# Altium PCB DS627-1.1-A机械能守恒实验器.PcbDoc
Units mm, origin at the board's own origin, x right, y up, seen from the top; angles counter-clockwise.
Board outline 64 x 42 mm, 2 copper layers (Top Layer, Bottom Layer), stack 1.581 mm thick; 33 components, 40 nets, 159 pads, 46 vias.
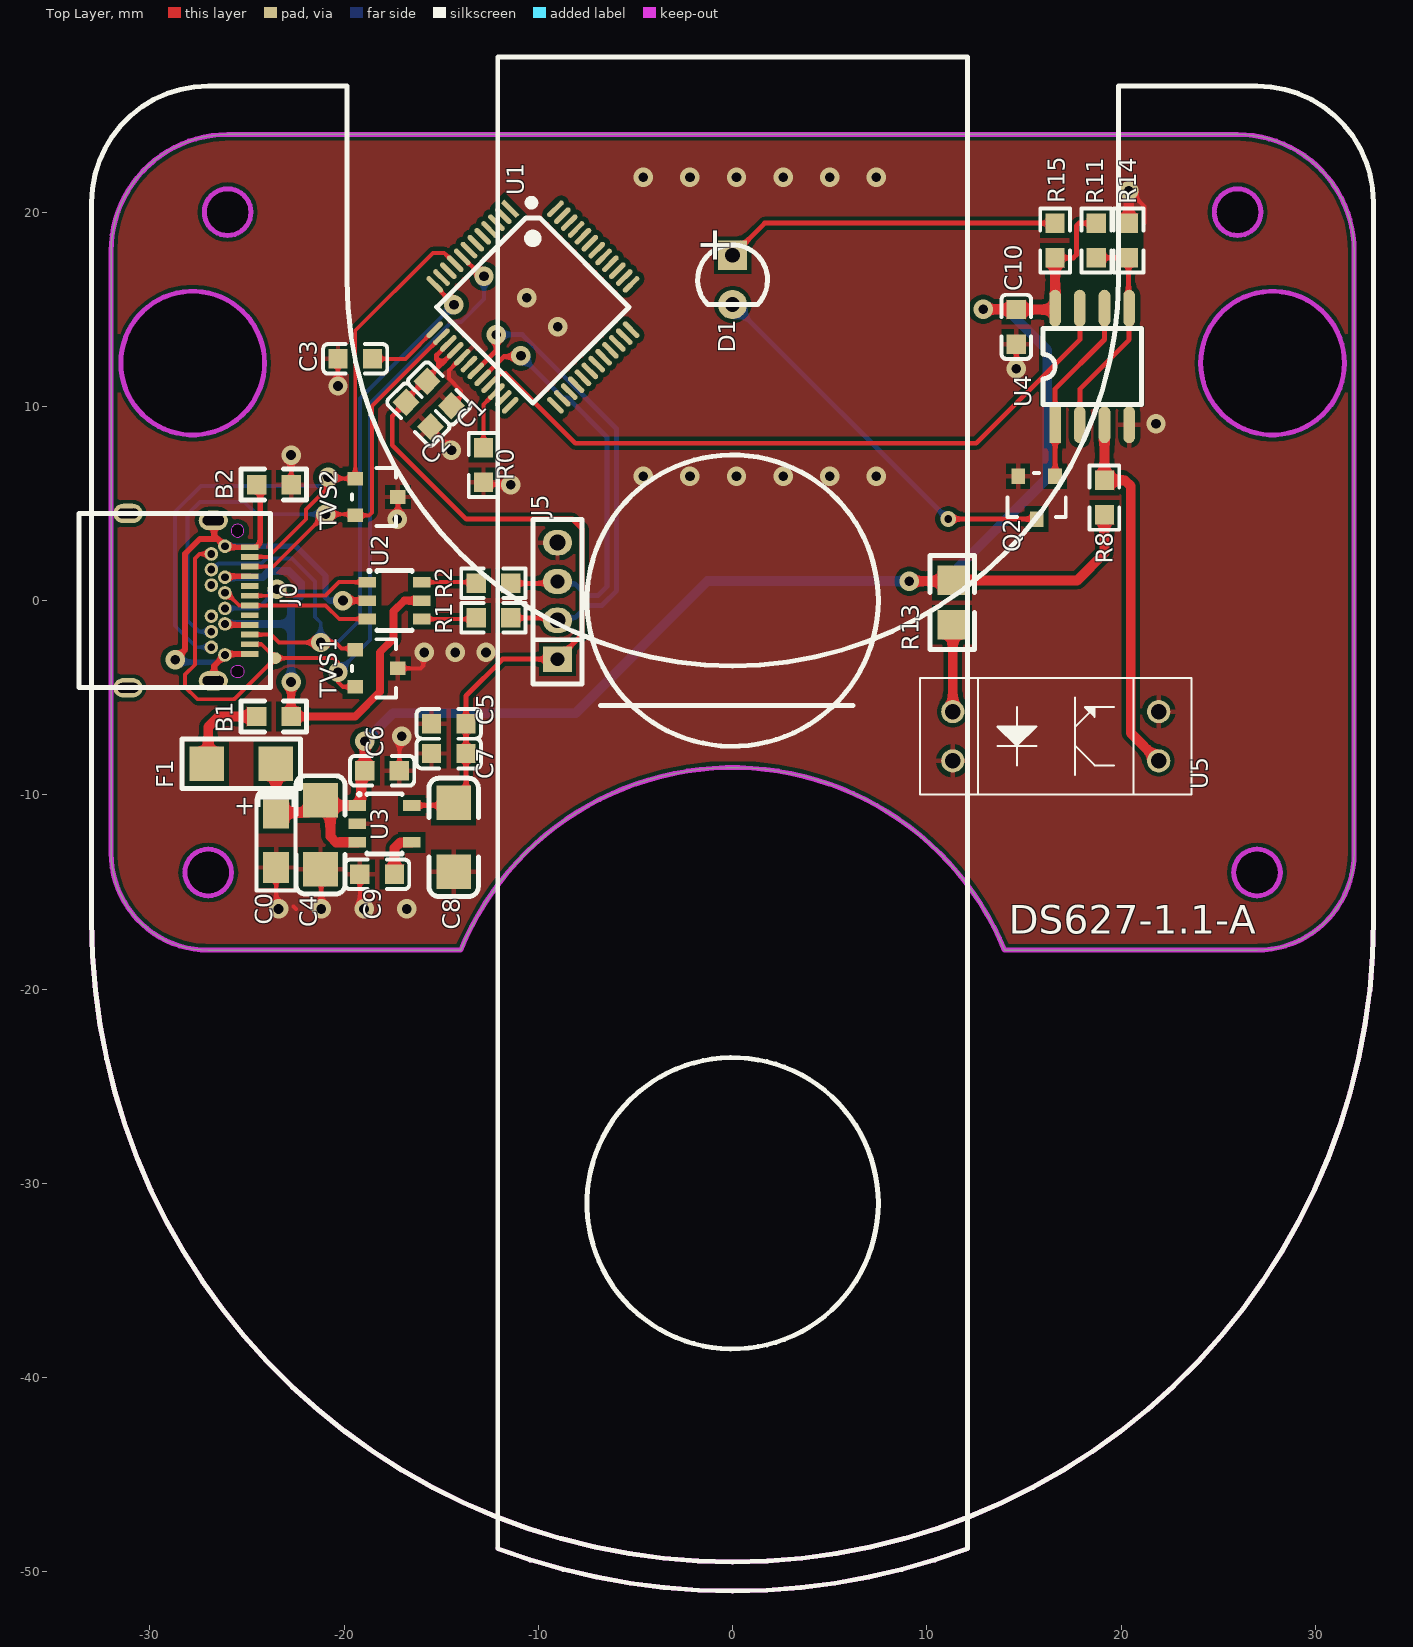
[diagram p0: Top Layer view]
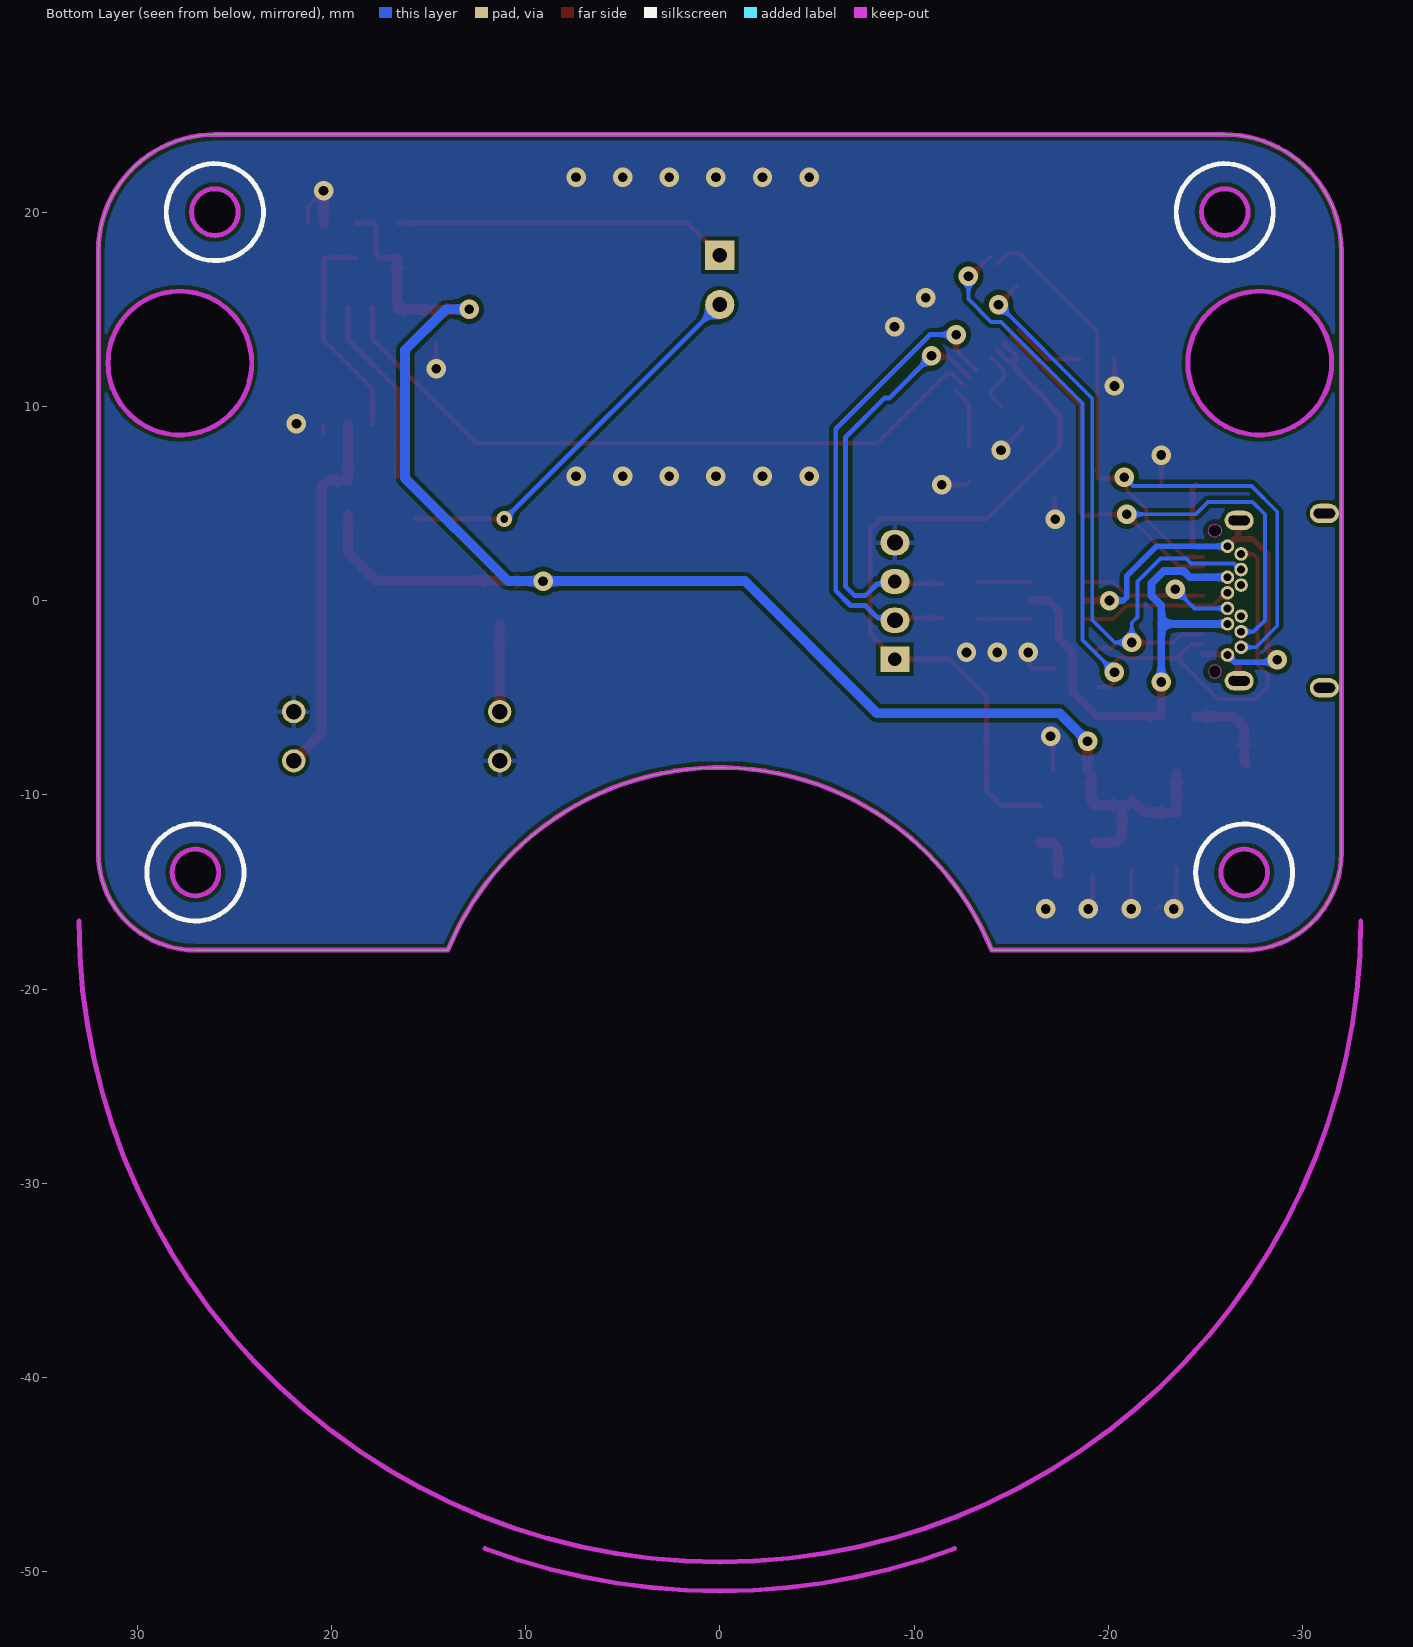
[diagram p1: Bottom Layer view, seen from below]
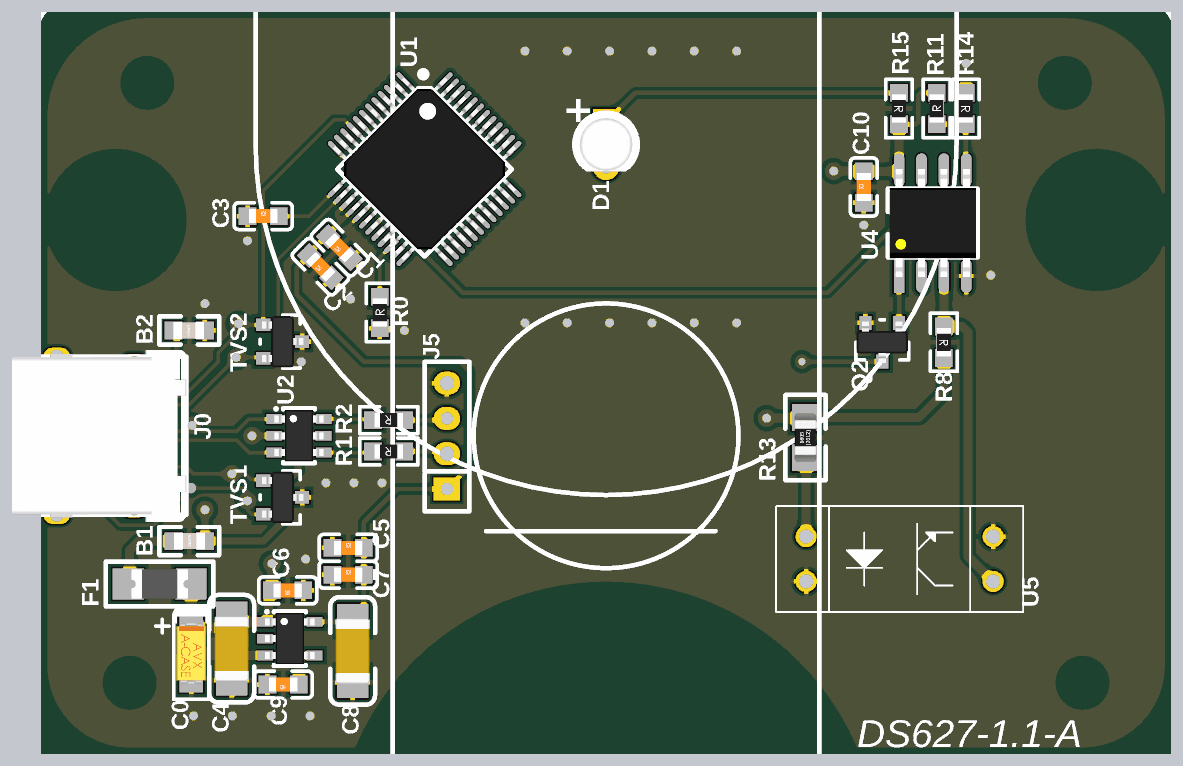
[diagram p2: 3D render of the assembled board from above, using the file's embedded part models]

## Layer stack, top to bottom
Top Solder: solder mask 0.0102, Solder Resist, Dk 3.5
Top Layer: signal copper 0.0356
Dielectric 1: dielectric 1.51, FR-4, Dk 4.8
Bottom Layer: signal copper 0.0356
Bottom Solder: solder mask 0.0102, Solder Resist, Dk 3.5

## Board outline
-27,-18 cw(c-27,-13) -32,-13 -32,18 cw(c-26,18) -26,24 26,24 cw(c26,18) 32,18 32,-13 cw(c27,-13) 27,-18 14,-18 ccw(c0,-23.725) -14,-18
cut-out: 27.8,8.53 cw(c27.8,12.23) 24.1,12.23 cw(c27.8,12.23) 27.8,15.93 cw(c27.8,12.23) 31.5,12.23 cw(c27.8,12.23)
cut-out: -27.8,8.53 cw(c-27.8,12.23) -31.5,12.23 cw(c-27.8,12.23) -27.8,15.93 cw(c-27.8,12.23) -24.1,12.23 cw(c-27.8,12.23)
cut-out: 26,18.8 cw(c26,20) 24.8,20 cw(c26,20) 26,21.2 cw(c26,20) 27.2,20 cw(c26,20)
cut-out: -26,18.8 cw(c-26,20) -27.2,20 cw(c-26,20) -26,21.2 cw(c-26,20) -24.8,20 cw(c-26,20)
cut-out: -27,-15.2 cw(c-27,-14) -28.2,-14 cw(c-27,-14) -27,-12.8 cw(c-27,-14) -25.8,-14 cw(c-27,-14)
cut-out: 27,-15.2 cw(c27,-14) 25.8,-14 cw(c27,-14) 27,-12.8 cw(c27,-14) 28.2,-14 cw(c27,-14)

## Design rules (kind name [scope] priority, off if disabled: settings)
Clearance [All] p1: gap=0.254 ignorepadtopadclearanceinfootprint=TRUE except(0: Arc-Hole Track-Hole SMDPad-Hole THPad-Hole Via-Hole Fill-Hole Poly-Hole Region-Hole Text-Hole; 0.12: THPad-THPad; 0.15: Arc-SMDPad Arc-THPad Track-SMDPad Track-THPad SMDPad-SMDPad; 0.2: Arc-Arc Arc-Track Arc-Via Arc-Fill Arc-Poly Arc-Region Arc-Text Track-Track Track-Via Track-Fill Track-Poly Track-Region Track-Text SMDPad-THPad SMDPad-Text THPad-Fill THPad-Poly THPad-Region)
MinimumSolderMaskSliver [All] p1: minsoldermaskwidth=0.2
PolygonConnect GND [All] p1: thpad.connectstyle=Relief thpad.reliefconductorwidth=0.254 thpad.reliefentries=4 thpad.polygonreliefangle="90 Angle" thpad.airgapwidth=0.254 smdpad.connectstyle=Relief smdpad.reliefconductorwidth=0.254 smdpad.reliefentries=4 smdpad.polygonreliefangle="90 Angle" smdpad.airgapwidth=0.254 via.connectstyle=Direct via.reliefconductorwidth=0.254 via.reliefentries=4 via.polygonreliefangle="90 Angle" via.airgapwidth=0.254
PolygonConnect VSS [InNet('VSS') vs InNet('VSS')] p2: thpad.connectstyle=Relief thpad.reliefconductorwidth=0.508 thpad.reliefentries=4 thpad.polygonreliefangle="90 Angle" thpad.airgapwidth=0.254 smdpad.connectstyle=Relief smdpad.reliefconductorwidth=0.508 smdpad.reliefentries=4 smdpad.polygonreliefangle="90 Angle" smdpad.airgapwidth=0.254 via.connectstyle=Direct via.reliefconductorwidth=0.508 via.reliefentries=4 via.polygonreliefangle="90 Angle" via.airgapwidth=0.254
RoomDefinition DS627-1.1-A机械能守恒实验器 [InComponentClass('DS627-1.1-A机械能守恒实验器')] p1: confinementstyle=ConfineIn formatcopy=TRUE lockcomponents=FALSE outline -206.3,-522.5 -155.5,-522.5 -155.5,-497.1 -206.3,-497.1
RoutingVias [All] p1: holewidth=0.6 width=1 viastyle="Through Hole" minholewidth=0.4 minwidth=0.8 maxholewidth=1 maxwidth=2
SilkToSilkClearance [All] p1: silktosilkclearance=0.1
SilkToSolderMaskClearance [IsPad] p1: minsilkscreentomaskgap=0.05 clearancetoexposedcopper=TRUE
SolderMaskExpansion [All] p1: expansion=0.102 istentingtop=FALSE
Width [All] p1: maxlimit=1 minlimit=0.2 preferedwidth=0.2
27 further rules are at their usual default settings.

## Components (designator, comment, footprint, x,y, rotation, side; value= is the part's Value field where it differs from the comment)
B1 "CBM160808U102" 0603Bead -23.622,-5.969 r180 top
B2 "CBM160808U102" 0603Bead -23.622,5.969 r0 top
C0 "AVX_10uF/16V ±10％(C106)" AVX_3216-18(1206)_SMD -23.506,-12.332 r270 top value=10uF
C1 "SMDCAP00013" 0603CAP -15.107,10.662 r135 top value=100nF
C2 "SMDCAP00012" 0603CAP -16.184,9.584 r135 top value=4.7uF
C3 "SMDCAP00015" 0603CAP -19.431,12.446 r0 top value=1uF
C4 "MLCC 10uF 50V ±20％ 1206" 1206CAP -21.22,-12.065 r90 top value=10uF
C5 "SMDCAP00013" 0603CAP -14.616,-6.35 r0 top value=100nF
C6 "SMDCAP00015" 0603CAP -18.045,-8.763 r180 top value=1uF
C7 "SMDCAP00015" 0603CAP -14.616,-7.874 r0 top value=1uF
C8 "MLCC 10uF 50V ±20％ 1206" 1206CAP -14.362,-12.192 r90 top value=10uF
C9 "SMDCAP00010" 0603CAP -18.298,-14.097 r180 top value=10nF
C10 "SMDCAP00013" 0603CAP 14.605,14.097 r90 top value=100nF
D1 "Φ3 透明发红 DIP2" LED_3mm_red 0,16.51 r270 top locked value=red
F1 "SMD1206-050C-16V" 1206FUSE -25.3,-8.4 r0 top value="16V /0.5A"
J0 "USB_Type_C_24P" USB_TYPE_C_24P_Receptacle -28,0 r270 top locked
J5 "DIP4单排直针  间距2mm 针长11mm 铜" H4 -9.017,-3.016 r90 top value=4P
Q2 "SMDIC000037" SOT23 15.65,5.3 r180 top value=DTC114ECA
R0 "Chip 0R 1/16W ±1％ 0603" 0603RES -12.827,6.985 r90 top value=0R
R1 "Chip 22R 1/16W ±1％ 0603" 0603RES -12.319,-0.889 r180 top value=22R
R2 "Chip 22R 1/16W ±1％ 0603" 0603RES -12.319,0.889 r180 top value=22R
R8 "Chip 1K 1/16W ±1％ 0603" 0603RES 19.146,5.3 r270 top value=1K
R11 "SMDRES00090" 0603RES 18.732,18.542 r90 top value="20K ±0.1%"
R13 "SMDRES00016" 0805RES 11.3,-0.1 r90 top value=100R
R14 "SMDRES00034" 0603RES 20.383,18.542 r270 top value="5K ±0.1%"
R15 "SMDRES00034" 0603RES 16.6,18.542 r270 top value=1K
TVS1 "MMBZ9V1A" SOT23 -18.331,-3.49 r270 top
TVS2 "MMBZ9V1A" SOT23 -18.331,5.334 r270 top
U1 "STC32G12K128_35I LQFP48" LQFP-48 -10.287,15.113 r315 top value=STC32G12K128
U2 "82400102" SOT23-6 -17.402,0 r270 top
U3 "ME6211C33M5G-N" SOT23-5 -17.921,-11.496 r270 top
U4 "LMV358IDGKR  VSSOP-8" SO-8 16.606,9.055 r90 top value=LMV358
U5 "XL-ITR8402" XL-ITR8402_L14.0-W6.0 16.637,-6.984 r180 top

## Footprints (in the part's own frame and the unit in brackets; to place one, negate y for a bottom-side part, rotate by r counter-clockwise, add the part's x,y. Pads: shape width x height; smd on the part's side, far side on the other; paste and mask are expansions set on the pad)
0603Bead [mm]
  rect 1x1 smd: 1(-0.889,0) 2(0.889,0)
  silkscreen extent -1.69,-0.8 1.69,0.8, body extent -0.9,-0.48 0.85,0.48, height 0.95
0603CAP [mm]
  rect 1x1 smd: 1(-0.889,0) 2(0.89,0)
  silkscreen extent -1.65,-0.76 1.65,0.76, body extent -0.8,-0.4 0.8,0.4, height 0.3
0603RES [mm]
  rect 1x1 smd: 1(-0.889,0) 2(0.889,0)
  silkscreen extent -1.65,-0.76 1.65,0.76, body extent -0.8,-0.41 0.8,0.41, height 0.51
0805RES [mil]
  rect 60x60 smd: 1(-45,0) 2(45,0)
  silkscreen extent -95,-45 95,45, body extent -55,-25 55,25, height 32
1206CAP [mil]
  rect 70x70 smd: 1(-70,0) 2(70,0)
  silkscreen extent -120,-50 120,50, body extent -73,-38 73,38, height 47
1206FUSE [mil]
  rect 70x70 smd: 1(-70,0) 2(70,0)
  silkscreen extent -120,-50 120,50, body extent -63,-33 63,33, height 57
AVX_3216-18(1206)_SMD [mm]
  rect 1.6x1.35 smd: 1(-1.41,0) 2(1.41,0)
  silkscreen extent -2.6,-1 2.6,1, body extent -1.7,-0.84 1.7,0.84, height 1.71
H4 [mm]
  rect 1.3x1.5 hole 0.7: 1(0,0)
  oval 1.3x1.5 hole 0.813: 2(2,0) 4(6,0)
  oval 1.3x1.5 hole 0.7: 3(4,0)
  silkscreen extent -1.27,-1.27 7.2,1.27
LED_3mm_red [mm]
  rect 1.5x1.5 hole 0.76: 1(-1.27,0)
  round 1.5 hole 0.76: 2(1.27,0)
  silkscreen extent -1.8,-1.8 1.27,1.8, body extent -1.9,-1.9 1.53,1.9, height 7.64
LQFP-48 [mm]
  rect 1.1x0.27 smd mask+0.08: 1(-4.4,2.75)
  oval 1.1x0.27 smd mask+0.08: 2(-4.4,2.25) 3(-4.4,1.75) 4(-4.4,1.25) 5(-4.4,0.75) 6(-4.4,0.25) 7(-4.4,-0.25) 8(-4.4,-0.75) 9(-4.4,-1.25) 10(-4.4,-1.75) 11(-4.4,-2.25) 12(-4.4,-2.75) 25(4.4,-2.75) 26(4.4,-2.25) 27(4.4,-1.75) 28(4.4,-1.25) 29(4.4,-0.75) 30(4.4,-0.25) 31(4.4,0.25) 32(4.4,0.75) 33(4.4,1.25) 34(4.4,1.75) 35(4.4,2.25) 36(4.4,2.75)
  oval 0.27x1.1 smd mask+0.08: 13(-2.75,-4.4) 14(-2.25,-4.4) 15(-1.75,-4.4) 16(-1.25,-4.4) 17(-0.75,-4.4) 18(-0.25,-4.4) 19(0.25,-4.4) 20(0.75,-4.4) 21(1.25,-4.4) 22(1.75,-4.4) 23(2.25,-4.4) 24(2.75,-4.4) 37(2.75,4.4) 38(2.25,4.4) 39(1.75,4.4) 40(1.25,4.4) 41(0.75,4.4) 42(0.25,4.4) 43(-0.25,4.4) 44(-0.75,4.4) 45(-1.25,4.4) 46(-1.75,4.4) 47(-2.25,4.4) 48(-2.75,4.4)
  silkscreen extent -3.95,-3.5 3.5,3.85, body extent -4.51,-4.5 4.5,4.5, height 1.54
SO-8 [mm]
  rect 1.9x0.6 smd: 1(0,0)
  oval 1.9x0.6 smd: 2(0,-1.27) 3(0,-2.54) 4(0,-3.81) 5(6,-3.81) 6(6,-2.54) 7(6,-1.27) 8(6,0)
  silkscreen extent 1.05,-4.44 4.95,0.64, body extent -0.07,-4.35 6.07,0.54, height 1.77
SOT23 [mm]
  rect 0.7x0.8 smd: 1(-0.95,-1.1) 2(0.95,-1.1) 3(0,1.1)
  silkscreen extent -1.5,-1.27 1.5,1, body extent -1.46,-1.17 1.46,1.17, height 1
SOT23-5 [mm] "SOT-23/SC-74A; 5 Leads; Body 3.1 x 3 mm, inc. leads (LxW max)"
  rect 0.55x0.9 smd: 1(-0.95,-1.4) 2(0,-1.4) 3(0.95,-1.4) 4(0.95,1.4) 5(-0.95,1.4)
  silkscreen extent -1.58,-1.36 1.55,0.9, body extent -1.45,-1.4 1.45,1.4, height 1.45
SOT23-6 [mm] "SOT-23/SC-74A; 5 Leads; Body 3.1 x 3 mm, inc. leads (LxW max)"
  rect 0.55x0.9 smd: 1(-0.95,-1.4) 2(0,-1.4) 3(0.95,-1.4) 4(0.95,1.4) 5(0,1.4) 6(-0.95,1.4)
  silkscreen extent -1.58,-1.36 1.55,0.9, body extent -1.45,-1.4 1.45,1.4, height 1.45
USB_TYPE_C_24P_Receptacle [mm]
  oval 1x1.5 hole 0.5 slot 1.1 at 90.5 deg: 0(-4.49,-3.13) 0(-4.13,1.26) 0(4.13,1.26) 0(4.49,-3.13)
  rect 0.3x0.9 smd mask+0.1: A1(-2.75,3.13) A2(-2.25,3.13) A3(-1.75,3.13) A4(-1.25,3.13) A5(-0.75,3.13) A6(-0.25,3.13) A7(0.25,3.13) A8(0.75,3.13) A9(1.25,3.13) A10(1.75,3.13) A11(2.25,3.13) A12(2.75,3.13)
  round 0.7 hole 0.4: B1(2.8,1.86) B2(2.4,1.16) B3(1.6,1.16) B4(1.2,1.86) B5(0.8,1.16) B6(0.4,1.86) B7(-0.4,1.86) B8(-0.8,1.16) B9(-1.2,1.86) B10(-1.6,1.16) B11(-2.4,1.16) B12(-2.8,1.86)
  Keep-Out Layer board cut-out: 3.98,2.51 3.955,2.384 3.883,2.277 3.776,2.205 3.65,2.18 3.65,2.18 3.524,2.205 3.417,2.277 3.345,2.384 3.32,2.51 3.32,2.51 3.345,2.636 3.417,2.743 3.524,2.815 3.65,2.84 3.65,2.84 3.776,2.815 3.883,2.743 3.955,2.636 3.98,2.51
  Keep-Out Layer board cut-out: -3.93,2.51 -3.905,2.384 -3.833,2.277 -3.726,2.205 -3.6,2.18 -3.6,2.18 -3.474,2.205 -3.367,2.277 -3.295,2.384 -3.27,2.51 -3.27,2.51 -3.295,2.636 -3.367,2.743 -3.474,2.815 -3.6,2.84 -3.6,2.84 -3.726,2.815 -3.833,2.743 -3.905,2.636 -3.93,2.51
  silkscreen extent -4.48,-5.66 4.48,4.21, body extent -4.87,-5.66 4.88,4.21, height 3.36
XL-ITR8402_L14.0-W6.0 [mm] "14x6 光电开关"
  round 1.2 hole 0.8: 1(5.3,-1.27) 2(5.3,1.27) 3(-5.3,1.27) 4(-5.3,-1.27)
  silkscreen extent -7,-3 7,3

## Part data
B1 B2: library part "Chip Ferrite Bead 0606", "贴片磁珠"
C0: "钽电容"
C1 C5 C10: library part "MLCC 100nF 50V ±10％ 0603", "贴片电容"
C2: library part "MLCC 4.7uF 50V ±10％ 0603", "贴片电容"
C3 C6 C7: library part "MLCC 1uF 50V ±10％ 0603", "贴片电容"
C4 C8: "贴片电容"
C9: library part "MLCC 10nF 50V ±10％ 0603", "贴片电容"
D1: "插件LED"
F1: "贴片自恢复保险丝 16V /0.5A"
J5: "单排直针"
Q2: library part "DTC114ECA SOT-23 长电", "数字晶体管"
R0 R1 R2 R8: "贴片电阻"
R11: library part "Chip 20K 1/10W ±0.1％ 0603"
R13: library part "Chip 100R 1/10W ±1％ 0805", "贴片电阻"
R14: library part "Chip 5K 1/10W ±0.1％ 0603"
R15: library part "Chip 1K 1/16W ±1％ 0603", "贴片电阻"
TVS1 TVS2: library part TVS, "瞬态抑制二极管"
U1: "单片机芯片"
U2: "瞬态抑制二极管(TVS)"
U3: "稳压芯片"
U4: "双路、5.5V、1MHz、4mV 失调电压、RRO 运算放大器"
U5: "光电开关"

## Free pads (board coordinates)
  round 0.6 smd mask+0.102: 2(-23.536,-2.962)

## Via types
v1: diameter 1, hole 0.5, Top Layer to Bottom Layer, tented both sides, 45 vias
v2: diameter 0.813, hole 0.406, Top Layer to Bottom Layer, tented both sides, 1 vias

## Nets (pads, with @x,y where several pads share a name; then routed paths per layer and width w, separated by ;. In a path a pad name is that pad's centre, name@x,y a point inside that pad or via, vN(x,y) a via of type N, cw(c..) or ccw(c..) an arc to the next point about the centre after c; other vN are vias at no path point)
ADC0: U1.5
ADC1: U1.6
D+_I/O1: J0.A6 J0.B6 U2.1 | length 10.2
  Top Layer w0.2: J0.A6 -23.849,0.25 -23.509,0.59 v1(-23.457,0.59) -23.276,0.59 -22.94,0.254 -20.955,0.254 -20.259,0.95 U2.1
  Bottom Layer w0.2: -25.647,-0.374 -26.114,-0.374 J0.B6 -24.447,-0.4 v1(-23.457,0.59)
D-_I/O2: J0.A7 J0.B7 U2.3 | length 7.9
  Top Layer w0.2: J0.B7 -26.054,0.4 -25.404,-0.25 J0.A7 -20.955,-0.25 -20.255,-0.95 U2.3
DAC_OUT: U1.10
Dis1_red_EN: U1.35
Dis2_green_EN: U1.34
Dis3_blue_EN: U1.36
GND: B2.2 C0.2 C1.1 C2.1 C3.1 C4.1 C5.1 C6.1 C7.1 C8.1 C9.2 C10.1 J5.4 Q2.2 R0.1 R14.1 TVS1.3 TVS2.3 U1.17 U3.2 U4.4 U5.2 U5.4 | length 25.9
  Top Layer w0.2: v1@-23.506,-15.748 C0.2 ; B2.2 v1(-22.733,7.493) ; -22.606,-15.748 -22.479,-15.875 ; C4.1 -21.178,-13.885 v1(-21.178,-15.875) ; v1(-20.32,11.049) C3.1 ; C9.2 -19.188,-15.447 -18.976,-15.659 v1(-18.976,-15.875) ; v1(-17.272,4.191) -17.231,4.232 TVS2.3 ; TVS1.3 -16.063,-3.49 -15.923,-3.35 -15.923,-2.715 v1(-15.875,-2.667) ; C6.1 -17.156,-7.112 v1(-17.029,-6.985) ; C2.1 -15.556,8.825 v1(-14.478,7.747) ; C1.1 -13.97,10.541 -13.97,10.795 -14.605,11.43 -14.605,11.856 U1.17 ; R0.1 -12.7,5.969 v1(-11.43,5.969) ; v1(14.605,11.938) C10.1 ; v1(20.4,21.1) 21.209,20.291 21.209,19.431 ; U4.4@20.416,8.513 U4.4
  Top Layer w0.508: R14.1 20.4,19.447 v1(20.4,21.1)
  other v1: -23.379,-15.875 -16.775,-15.875 -14.287,-2.667 -12.7,-2.667 -4.6,6.4 -2.2,6.4 0.2,6.4 2.6,6.4 5,6.4 7.4,6.4 21.8,9.1 -9,14.1 -10.6,15.6 -4.6,21.8 -2.2,21.8 0.2,21.8 2.6,21.8 5,21.8 7.4,21.8
I2C1_SCL: U1.38
I2C1_SDA: U1.37
IRT_EN: U1.33
KEY_HOME: U1.21 U4.7 | length 36
  Top Layer w0.2: U1.21 -11.948,11.684
  Top Layer w0.254: -11.948,11.684 -11.684,11.684 -8.1,8.1 12.545,8.1 17.876,13.431 U4.7 U4.7@17.907,15.086
NetB1_2: B1.2 F1.1 | length 4.6
  Top Layer w0.508: F1.1 -27,-8.322 -27,-6.5 -26.469,-5.969 B1.2
NetC9_1: C9.1 U3.4 | length 2.4
  Top Layer w0.508: C9.1 -17.409,-12.744 -17.111,-12.446 U3.4
NetD1_1: D1.1 R15.1 | length 17.3
  Top Layer w0.254: D1.1 1.651,19.431 R15.1
NetD1_2: D1.2 Q2.3 | length 20.2
  Top Layer w0.254: v2(11.1,4.2) Q2.3
  Bottom Layer w0.254: D1.2 0.03,15.24 11.07,4.2 v2(11.1,4.2)
NetQ2_1: Q2.1 U4.1 U4.6 | length 9.7
  Top Layer w0.254: Q2.1 16.606,6.406 U4.1 16.606,10.906 19.146,13.446 U4.6
NetR8_1: R8.1 U4.3 U5.3 | length 19.1
  Top Layer w0.508: U4.3 R8.1 20.202,6.189 20.5,5.891 20.5,-6.817 U5.3
NetR11_1: R11.1 R14.2 U4.2 U4.5 | length 11.3
  Top Layer w0.254: U4.2 17.876,10.891 20.416,13.431 U4.5 20.383,15.088 R14.2 R11.1
NetR13_1: R13.1 U5.1 | length 4.5
  Top Layer w0.508: R13.1 11.337,-1.28 U5.1
P3.0/D-/RxD: J5.2 R1.1 U1.19 | length 25
  Top Layer w0.254: U1.19 -12.17,12.876 v1(-12.17,13.694) ; R1.1 J5.2@-9.144,-0.889 ; J5.2 J5.2@-8.873,-0.872
  Bottom Layer w0.254: v1(-12.17,13.694) -10.825,13.694 -5.969,8.839 -5.969,0.508 -6.731,-0.254 -7.493,-0.254 -8.111,-0.872 J5.2@-8.873,-0.872 ; J5.2@-9.144,-0.889 J5.2
P3.1/D+/TxD: J5.3 R2.1 U1.20 | length 21.8
  Top Layer w0.254: U1.20 -11.781,12.558 -10.942,12.558 v1(-10.9,12.6) ; R2.1 -9.112,0.889 J5.3 J5.3@-8.889,0.856
  Bottom Layer w0.254: v1(-10.9,12.6) -8.741,10.441 -8.493,10.441 -6.477,8.426 -6.477,0.718 -6.941,0.254 -7.493,0.254 -8.095,0.856 J5.3@-8.889,0.856
P3.3: R0.2 U1.22 | length 3.2
  Top Layer w0.2: R0.2 -12.827,10.098 U1.22
SPI1/SPI2_CS: J0.A3 J0.B3 TVS2.2 U1.14 | length 32.7
  Top Layer w0.2: J0.A3 -23.65,1.75 v1(-20.955,4.445) -19.492,4.445 TVS2.2 -18.73,4.384 -18.573,4.541 -18.573,10.009 U1.14
  Bottom Layer w0.2: J0.B3@-26.778,-1.6 J0.B3 -27.483,-1.6 -28.067,-1.016 -28.067,4.445 -27.432,5.08 -25.146,5.08 -24.57,4.504 ccw(c-24.428,4.645) -24.428,4.445 v1(-20.955,4.445)
SPI1_MISO: J0.A11 J0.B11 pad.2 TVS1.2 U1.8 | length 46
  Top Layer w0.2: J0.B11 -27.445,2.4 -27.686,2.159 -27.686,-3.302 -28.194,-3.81 -28.194,-4.445 -27.559,-5.08 -25.737,-5.08 ccw(c-25.737,-4.88) -25.596,-5.022 pad.2 ; J0.A11 -24.246,-2.251 pad.2 ; TVS1.2 -19.436,-4.445 -20.068,-4.445 -20.32,-4.193 v1(-20.32,-3.684) -20.32,-3.175 -20.533,-2.962 pad.2 ; U1.8 -13.91,17.694 -12.916,16.7 v1(-12.8,16.7)
  Bottom Layer w0.2: J0.B11@-27.007,2.316 ccw(c-27.007,2.516) -26.866,2.374 J0.B11 ; v1(-20.32,-3.684) -18.669,-2.033 -18.669,10.16 -14.478,14.351 -13.97,14.351 -12.8,15.521 v1(-12.8,16.7)
SPI1_MOSI: J0.A10 J0.B10 TVS1.1 U1.12 | length 37.3
  Top Layer w0.2: J0.A10 -23.772,-1.75 -23.363,-2.159 v1(-21.209,-2.159) -20.447,-2.159 -20.389,-2.217 -20.141,-2.465 -20.059,-2.465 -19.506,-2.465 TVS1.1 ; U1.12@-15.343,16.261 -15.014,15.932 -15.014,15.903 v1(-14.351,15.24)
  Bottom Layer w0.2: J0.B10 -26.778,1.6 -26.473,1.905 -24.257,1.905 -24.003,2.159 -22.689,2.159 -21.504,0.975 -21.504,-0.848 -21.209,-1.143 v1(-21.209,-2.159) -20.336,-2.159 -19.177,-1 -19.177,10.414 v1(-14.351,15.24)
SPI1_SCK: J0.A2 J0.B2 TVS2.1 U1.9 | length 39.1
  Top Layer w0.2: J0.A2 -23.912,2.25 -21.971,4.191 -21.971,4.699 -20.94,5.73 -20.94,6.238 v1(-20.828,6.35) ; v1@-20.762,6.284 TVS2.1 -19.431,13.901 -15.425,17.907 -14.849,17.907 U1.9
  Bottom Layer w0.2: J0.B2 -27.598,-2.4 -28.702,-1.296 -28.702,4.572 -27.368,5.905 -21.273,5.905 v1(-20.828,6.35)
SPI2_MISO: U1.29
SPI2_MOSI: U1.18
SPI2_SCK: U1.31
UCAP: C3.2 U1.13 | length 3.8
  Top Layer w0.2: C3.2 -16.843,12.446 U1.13
USART2_RXD: U1.27
USART2_TXD: U1.28
USB_D+: R2.2 U2.6 | length 2.8
  Top Layer w0.2: U2.6 -13.269,0.95 R2.2
USB_D-: R1.2 U2.4 | length 2.8
  Top Layer w0.2: U2.4 -13.269,-0.95 R1.2
VBUS: B1.1 J0.A4 J0.A9 J0.B4 J0.B9 U2.5 | length 28.6
  Top Layer w0.3: J0.B4 -26.09,-1.25 J0.A9 ; J0.B9 -26.09,1.25 J0.A4
  Top Layer w0.4: v1(-22.733,-4.191) B1.1 -19.431,-5.969 -18.161,-4.699 -18.161,-2.667 -17.462,-1.968 -17.462,-0.552 -16.911,0 U2.5
  Bottom Layer w0.4: J0.B4 -22.733,-1.2 ; J0.B9 -24.2,1.2 -23.876,1.524 -22.86,1.524 -22.225,0.889 -22.225,0.254 -22.733,-0.254 -22.733,-1.2 ; v1(-22.733,-4.191) -22.733,-1.2
VCC_3V3_MCU: C1.2 C2.2 C5.2 C7.2 C8.2 J5.1 U1.15 U1.16 U3.5 | length 39.9
  Top Layer w0.254: U3.5 -14.494,-10.546 C8.2 -13.726,-9.778 C7.2 C5.2 -13.726,-4.899 -11.843,-3.016 J5.1 -7.801,-1.8 -7.747,-1.746 -7.747,3.683 -8.255,4.191 -13.716,4.191 -17.526,8.001 -17.526,9.501 C2.2 -16.814,10.354 -14.981,12.187 ; U1.15 -15.24,12.635 -15.24,12.446 -14.981,12.187 ; U1.16 -14.981,12.187
VCC_5V: C0.1 C4.2 C6.2 C10.2 F1.2 R8.2 R11.2 R13.2 R15.2 U3.1 U3.3 U4.8 | length 86.9
  Top Layer w0.254: R15.2@16.606,17.647 17.547,17.647 17.7,17.8 17.7,19.3 17.831,19.431 R11.2
  Top Layer w0.508: F1.2@-23.506,-8.89 C0.1 -21.855,-10.922 C4.2 C4.2@-20.961,-10.546 ; U3.3 -20.414,-12.446 -20.712,-12.148 -20.712,-10.795 C4.2@-20.961,-10.546 ; U3.1 C4.2@-20.961,-10.546 ; U3.1@-19.128,-10.353 C6.2@-19.128,-8.956 ; C6.2 -18.935,-7.24 v1(-18.934,-7.239) ; v1(9.1,1) 11.257,1 R13.2 17.743,1.043 19.146,2.446 R8.2 ; v1(12.9,15) 12.906,14.994 14.599,14.994 C10.2 16.564,14.987 16.606,15.029 U4.8 R15.2@16.606,17.647
  Bottom Layer w0.508: v1(-18.934,-7.239) -17.495,-5.8 -8.097,-5.8 -1.297,1 v1(9.1,1) 10.9,1 16.2,6.3 16.2,12.9 14.1,15 v1(12.9,15)
VSS: B2.1 J0.0@-26.74,4.13 J0.0@-26.74,-4.13 J0.A1 J0.A12 J0.B1 J0.B12 U2.2 | length 29
  Top Layer w0.3: v1(-28.702,-3.048) -28.702,-3.03 -28.194,-2.522 -28.194,2.413 -27.432,3.175 -26.516,3.175 ; J0.0@-26.74,-4.13 -26.696,-4.086 -26.696,-3.356 J0.B1 -26.09,-2.75 J0.A12 ; J0.0@-26.74,4.13 -26.696,4.086 -26.696,3.356 -26.516,3.175 ; B2.1 -24.413,5.871 cw(c-24.625,5.659) -24.325,5.659 -24.325,3.098 cw(c-24.625,3.1) -24.368,2.945 -24.398,2.895 cw(c-24.655,3.05) -24.655,2.75 J0.A1 -26.09,2.75 J0.B12 -26.516,3.175 ; v1(-20.066,0) U2.2
  Bottom Layer w0.3: v1(-28.702,-3.048) -28.575,-3.175 -26.516,-3.175 J0.B1 ; J0.B12 -26.134,2.794 -22.479,2.794 -20.955,1.27 -20.955,0.176 -20.779,0 v1(-20.066,0)
pads on no net: J0.0@-31.13,4.49 J0.0@-31.13,-4.49 J0.A5 J0.A8 J0.B5 J0.B8 U1.1 U1.2 U1.3 U1.4 U1.7 U1.11 U1.23 U1.24 U1.25 U1.26 U1.30 U1.32 U1.39 U1.40 U1.41 U1.42 U1.43 U1.44 U1.45 U1.46 U1.47 U1.48

## Polygon pours and split planes (outlines as drawn)
GND on Bottom Layer "GND_L02_P000" (solid, remove dead copper, pour order 0): 26.205,-18 ccw(c26.89,-12.886) 32,-13.596 32,18.237 ccw(c26.538,18.237) 30.4,22.1 30.341,22.159 ccw(c25.903,17.721) 25.903,23.997 -25.997,23.997 ccw(c-26.187,18.404) -30,22.5 -30.35,22.15 ccw(c-26.89,18.383) -32,18.6 -32,-14 ccw(c-26.689,-14) -30.444,-17.756 -30.2,-18
GND on Top Layer "GND_L01_P001" (solid, remove dead copper, pour order 1): 27.262,-19 ccw(c27.262,-14.562) 30.4,-17.7 30.656,-17.444 ccw(c27.413,-14.2) 32,-14.2 32,18.237 ccw(c26.537,18.237) 30.4,22.1 30.341,22.159 ccw(c25.903,17.721) 25.903,23.997 -25.997,23.997 ccw(c-26.187,18.404) -30,22.5 -30.35,22.15 ccw(c-26.89,18.383) -32,18.6 -32,-14 ccw(c-26.689,-14) -30.444,-17.756 -30.2,-18 ccw(c-27.786,-15.586) -27.786,-19 -27.3,-19

## Keep-outs
Keep-Out Layer:
  circle w0.254: c-27,-14 r1.2
  circle w0.254: c27,-14 r1.2
  circle w0.254: c26,20 r1.2
  circle w0.254: c-26,20 r1.2
  circle w0.254: c-27.8,12.23 r3.7
  circle w0.254: c27.8,12.23 r3.7
  lines w0.254: -33,-16.5 -32.952,-18.287 -32.807,-20.068 -32.565,-21.839 -32.228,-23.594 -31.797,-25.328 -31.273,-27.037 -30.656,-28.715 -29.95,-30.356 -29.156,-31.958 -28.276,-33.513 -27.314,-35.019 -26.271,-36.471 -25.151,-37.864 -23.958,-39.194 -22.694,-40.458 -21.364,-41.651 -19.971,-42.771 -18.519,-43.814 -17.013,-44.776 -15.457,-45.656 -13.856,-46.45 -12.215,-47.156 -10.537,-47.773 -8.828,-48.297 -7.094,-48.728 -5.339,-49.065 -3.568,-49.307 -1.787,-49.452 0,-49.5 1.787,-49.452 3.568,-49.307 5.339,-49.065 7.094,-48.728 8.828,-48.297 10.537,-47.773 12.215,-47.156 13.856,-46.45 15.457,-45.656 17.013,-44.776 18.519,-43.814 19.971,-42.771 21.364,-41.651 22.694,-40.458 23.958,-39.194 25.151,-37.864 26.271,-36.471 27.314,-35.019 28.276,-33.513 29.156,-31.958 29.95,-30.356 30.656,-28.715 31.273,-27.037 31.797,-25.328 32.228,-23.594 32.565,-21.839 32.807,-20.068 32.952,-18.287 33,-16.5 ; -12.094,-48.811 -10.425,-49.387 -8.73,-49.877 -7.011,-50.28 -5.275,-50.594 -3.524,-50.82 -1.764,-50.955 0,-51 1.764,-50.955 3.524,-50.82 5.275,-50.594 7.012,-50.28 8.73,-49.877 10.425,-49.387 12.094,-48.811 ; -32,-13 ccw(c-27,-13) -27,-18 -14,-18 cw(c0,-23.725) 14,-18 27,-18 ccw(c27,-13) 32,-13 32,18 ccw(c26,18) 26,24 -26,24 ccw(c-26,18) -32,18 -32,-13

## Other copper
Top Layer:
  pour cut-out: -24.166,-0.556 -24.166,-1.444 -24.125,-1.485 ccw(c-23.237,-0.597) -23.237,-1.853 -21.903,-1.853 -21.699,-1.649 cw(c-21.11,-2.238) -21.11,-1.405 cw(c-21.11,-2.149) -20.583,-1.623 -20.33,-1.876 ccw(c-20.186,-1.733) -20.186,-1.936 -18.777,-1.936 -18.777,-3.144 -19.625,-3.144 cw(c-19.863,-3.383) -19.526,-3.383 -19.526,-3.836 -19.513,-3.836 -18.777,-4.572 -18.671,-4.572 ccw(c-18.671,-4.428) -18.569,-4.53 ccw(c-20.255,-2.844) -17.87,-2.844 -17.87,-0.552 cw(c-17.463,-0.552) -17.751,-0.263 -18.1,-0.263 -18.1,-1.479 -19.506,-1.479 -19.506,-1.256 -20.382,-1.256 cw(c-20.382,-0.556) -21.082,-0.556
  pour cut-out: 21.137,16.899 21.137,20.185 17.978,20.185 17.978,16.899
  pour cut-out: 21.2,10 21.2,14.1 15.8,14.1 15.8,10

## Silkscreen, mask and mechanical layers (free items; w line width, h text height)
Top Overlay:
  drawing of 154 lines, arcs and shapes, not listed
  text "DS627-1.1-A" at 14.222,-17.639 h2.5
Bottom Overlay:
  circle w0.254: c-26,20 r2.5
  circle w0.254: c26,20 r2.5
  circle w0.254: c27,-14 r2.5
  circle w0.254: c-27,-14 r2.5
Mechanical 1:
  circle w0.254: c27.8,12.23 r3.7
  circle w0.254: c-27.8,12.23 r3.7
  circle w0.254: c-26,20 r1.2
  circle w0.254: c26,20 r1.2
  circle w0.254: c27,-14 r1.2
  circle w0.254: c-27,-14 r1.2
  lines w0.254: -32,-13 ccw(c-27,-13) -27,-18 -14,-18 cw(c0,-23.725) 14,-18 27,-18 ccw(c27,-13) 32,-13 32,18 ccw(c26,18) 26,24 -26,24 ccw(c-26,18) -32,18 -32,-13

## Text inside footprints (layer, text, board x,y; h text height)
C0: Top Overlay "+" at -25.538,-10.033 h1 r270
D1: Top Overlay "+" at -2.242,19.304 h3 r270